# Altium PCB SteezyHS.PcbDoc
Units mm, origin at the board's own origin, x right, y up, seen from the top; angles counter-clockwise.
Board outline 285.25 x 94.86 mm, 2 copper layers (Component Side, Bottom Layer), stack 1.571 mm thick; 150 components, 94 nets, 778 pads, 2 vias.
Unrouted connection lines stored in the file: 189.
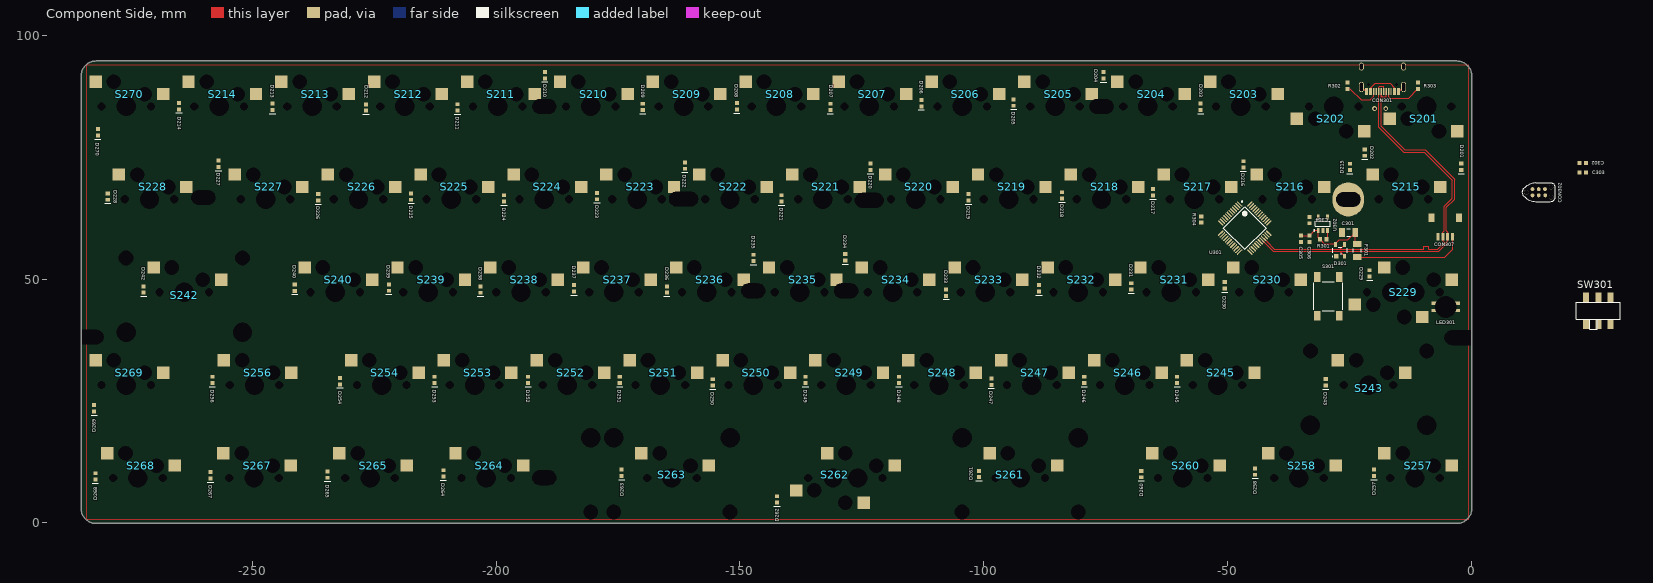
[diagram p0: Component Side view]
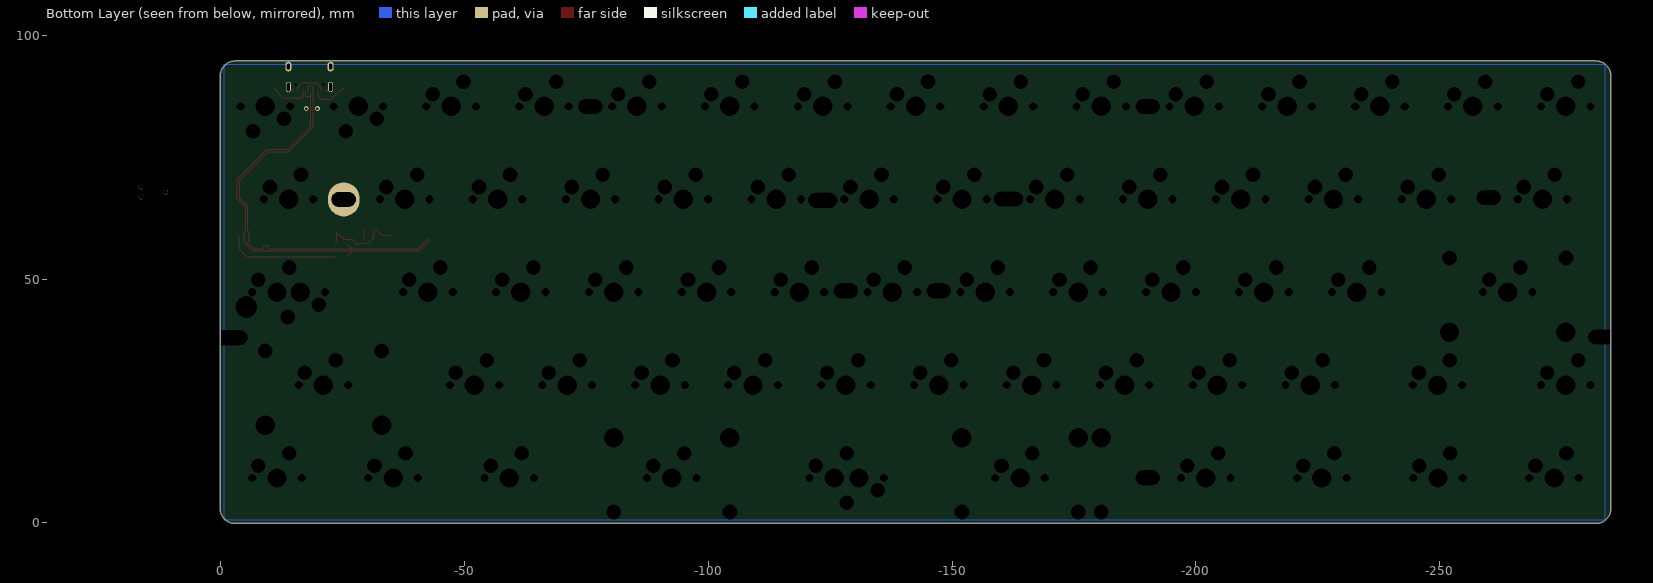
[diagram p1: Bottom Layer view, seen from below]

## Layer stack, top to bottom
Top Solder: solder mask 0.0102, Solder Resist, Dk 3.5
Component Side: signal copper 0.0356
Dielectric 1: core 1.5, FR-4, Dk 4.2
Bottom Layer: signal copper 0.0356
Solder Side: solder mask 0.0102, Solder Resist, Dk 3.5

## Board outline
-285.127,3.01 -285.127,91.615 cw(c-282,91.615) -282,94.742 cw(c-282,94.615) -281.999,94.742 -195.49,94.742 -198.628,94.742 ccw(c-198.628,94.615) -198.629,94.742 -198.628,94.742 -3,94.742 cw(c-3,91.615) 0.127,91.615 0.127,3.01 cw(c-3,3.01) -3,-0.117 cw(c-3,0.01) -3.035,-0.112 -281.965,-0.112 cw(c-282,0.01) -282,-0.117 cw(c-282,3.01)

## Design rules (kind name [scope] priority, off if disabled: settings)
Clearance [All] p1: gap=0.2 ignorepadtopadclearanceinfootprint=FALSE except(0: Arc-Hole Track-Hole SMDPad-Hole THPad-Hole Via-Hole Fill-Hole Poly-Hole Region-Hole Text-Hole; 0.254: THPad-THPad THPad-Via THPad-Fill THPad-Poly THPad-Region THPad-Text Via-Via Via-Fill Via-Poly Via-Region Via-Text Fill-Fill Fill-Poly Fill-Region Fill-Text Poly-Poly Poly-Region Poly-Text Region-Region Region-Text Text-Text)
ComponentClearance [InComponent('No Component') And OnLayer('Component Side')] p1: gap=0.254 collisioncheckmode=3 verticalgap=0.254 showdistances=FALSE
DiffPairsRouting DiffPairsRouting_USB [InDifferentialPairClass('All Differential Pairs')] p1: maxlimit=0.254 minlimit=0.203 mostfreqgap=0.203 toplayer_minwidth=0.152 toplayer_maxwidth=0.381 toplayer_prefwidth=0.152 bottomlayer_minwidth=0.152 bottomlayer_maxwidth=0.381 bottomlayer_prefwidth=0.152 maxuncoupledlength=12.7
DiffPairsRouting [All] p2: maxlimit=0.254 minlimit=0.254 mostfreqgap=0.254 toplayer_minwidth=0.381 toplayer_maxwidth=0.381 toplayer_prefwidth=0.381 bottomlayer_minwidth=0.381 bottomlayer_maxwidth=0.381 bottomlayer_prefwidth=0.381 maxuncoupledlength=12.7
HoleSize [All] p1: absolutevalues=TRUE maxlimit=20 minlimit=0.025 maxpercent=80.000 minpercent=20.000
MatchedLengths MatchedLengths_USB_DiffPairs_1 [All] p1: tolerance=0.127 checknetsindiffpair=TRUE checkdiffpairvsdiffpair=FALSE checkxsignals=FALSE checkothers=FALSE
MatchedLengths MatchedLengths_USB_DiffPairs [All] p2: tolerance=0.127 checknetsindiffpair=TRUE checkdiffpairvsdiffpair=FALSE checkxsignals=FALSE checkothers=FALSE
PolygonConnect PolygonConnect_1 [All vs IsVia] p1: connectstyle=Direct reliefconductorwidth=0.254 reliefentries=4 polygonreliefangle="90 Angle" airgapwidth=0.254
PolygonConnect [All] p2: connectstyle=Relief reliefconductorwidth=0.254 reliefentries=4 polygonreliefangle="90 Angle" airgapwidth=0.254
RoutingVias [All] p1: holewidth=0.711 width=1.27 viastyle="Through Hole" minholewidth=0.711 minwidth=1.27 maxholewidth=0.711 maxwidth=1.27
SolderMaskExpansion [All] p1: expansion=0.102
Width [All] p1: maxlimit=0.254 minlimit=0.203 preferedwidth=0.254
27 further rules are at their usual default settings.

## Classes and differential pairs
component class Designator: C201 C202 C203 C204 C205 C206 D201 D202 D203 D204 D205 D206 D207 D208 D209 D210 D211 D212 D213 D214 D215 D216 D217 D218 D219 D220 D221 D222 D223 D224 D225 D226 D227 D228 D229 D230 D231 D232 D233 D234 D235 D236 D237 D238 D239 D240 D242 D243 D245 D246 D247 D248 D249 D250 D251 D252 D253 D254 D256 D257 D258 D260 D261 D262 D263 D264 D265 D267 D268 D269 D270 S201 S202 S203 S204 S205 S206 S207 S208 S209 S210 S211 S212 S213 S214 S215 S216 S217 S218 S219 S220 S221 S222 S223 S224 S225 S226 S227 S228 S229 S230 S231 S232 S233 S234 S235 S236 S237 S238 S239 S240 S242 S243 S245 S246 S247 S248 S249 S250 S251 S252 S253 S254 S256 S257 S258 S260 S261 S262 S263 S264 S265 S267 S268 S269 S270 S271
differential pair D: +D_P -D_N

## Components (designator, comment, footprint, x,y, rotation, side; value= is the part's Value field where it differs from the comment)
C301 "" C1206[3216] -25.146,59.563 r0 top value=4,7uF
C302 "" C0603[1608] 22.86,73.787 r180 top value=0.1uF
C303 "" C0603[1608] 22.875,71.882 r180 top value=0.1uF
C304 "" C0603[1608] -33.147,62.103 r90 top value=1uF
C305 "" C0603[1608] -34.925,58.278 r90 top value=0.1uF
C306 "" C0603[1608] -33.147,58.278 r90 top value=1uF
CON301 "TYPE-C-31-M-12" TYPE-C-31-M-12 -18.2,88.5 r180 top
CON302 "TC2030-IDC" TC2030-IDC-NL 13.843,67.818 r0 top
CON307 "Header 5" "JST SM04B-SRSS-TB" -2.528,62.611 r180 top
D201 "Diode" D0603[1608] -2.032,73.04 r270 top
D202 "Diode" D0603[1608] -21.844,75.946 r270 top
D203 "Diode" D0603[1608] -55.499,85.359 r270 top
D204 "Diode" D0603[1608] -75.438,91.806 r270 top
D205 "Diode" D0603[1608] -93.853,86.218 r270 top
D206 "Diode" D0603[1608] -112.776,86.091 r270 top
D207 "Diode" D0603[1608] -131.445,85.329 r270 top
D208 "Diode" D0603[1608] -150.622,85.456 r270 top
D209 "Diode" D0603[1608] -169.926,85.329 r270 top
D210 "Diode" D0603[1608] -189.992,91.836 r270 top
D211 "Diode" D0603[1608] -207.899,85.217 r270 top
D212 "Diode" D0603[1608] -226.695,85.202 r270 top
D213 "Diode" D0603[1608] -245.872,85.344 r270 top
D214 "Diode" D0603[1608] -265.049,85.471 r270 top
D215 "Diode" D0603[1608] -24.892,73.01 r270 top
D216 "Diode" D0603[1608] -46.736,73.533 r270 top
D217 "Diode" D0603[1608] -65.278,67.818 r270 top
D218 "Diode" D0603[1608] -83.947,67.168 r270 top
D219 "Diode" D0603[1608] -103.124,66.802 r270 top
D220 "Diode" D0603[1608] -123.19,73.025 r270 top
D221 "Diode" D0603[1608] -141.478,66.548 r270 top
D222 "Diode" D0603[1608] -161.29,73.279 r270 top
D223 "Diode" D0603[1608] -179.324,67.041 r270 top
D224 "Diode" D0603[1608] -198.374,66.548 r270 top
D225 "Diode" D0603[1608] -217.424,66.929 r270 top
D226 "Diode" D0603[1608] -236.474,66.802 r270 top
D227 "Diode" D0603[1608] -256.921,73.675 r270 top
D228 "Diode" D0603[1608] -279.654,66.929 r270 top
D229 "Diode" D0603[1608] -20.828,51.166 r270 top
D230 "Diode" D0603[1608] -50.546,48.753 r270 top
D231 "Diode" D0603[1608] -69.723,48.514 r270 top
D232 "Diode" D0603[1608] -88.646,48.118 r270 top
D233 "Diode" D0603[1608] -107.696,47.229 r270 top
D234 "Diode" D0603[1608] -128.397,54.468 r270 top
D235 "Diode" D0603[1608] -147.193,54.356 r270 top
D236 "Diode" D0603[1608] -164.973,47.879 r270 top
D237 "Diode" D0603[1608] -184.023,48.133 r270 top
D238 "Diode" D0603[1608] -203.2,47.864 r270 top
D239 "Diode" D0603[1608] -221.996,48.26 r270 top
D240 "Diode" D0603[1608] -241.3,48.245 r270 top
D242 "Diode" D0603[1608] -272.288,47.879 r270 top
D243 "Diode" D0603[1608] -29.845,28.829 r270 top
D245 "Diode" D0603[1608] -60.325,29.337 r270 top
D246 "Diode" D0603[1608] -79.375,29.337 r270 top
D247 "Diode" D0603[1608] -98.425,28.971 r270 top
D248 "Diode" D0603[1608] -117.348,29.337 r270 top
D249 "Diode" D0603[1608] -136.525,29.337 r270 top
D250 "Diode" D0603[1608] -155.575,28.814 r270 top
D251 "Diode" D0603[1608] -174.625,29.322 r270 top
D252 "Diode" D0603[1608] -193.421,29.322 r270 top
D253 "Diode" D0603[1608] -212.598,29.322 r270 top
D254 "Diode" D0603[1608] -232.029,29.068 r270 top
D256 "Diode" D0603[1608] -258.191,29.322 r270 top
D257 "Diode" D0603[1608] -19.939,10.272 r270 top
D258 "Diode" D0603[1608] -44.323,10.526 r270 top
D260 "Diode" D0603[1608] -67.691,10.018 r270 top
D261 "Diode" D0603[1608] -100.965,10.033 r270 top
D262 "Diode" D0603[1608] -142.367,4.826 r270 top
D263 "Diode" D0603[1608] -174.244,10.272 r270 top
D264 "Diode" D0603[1608] -210.82,10.145 r270 top
D265 "Diode" D0603[1608] -234.569,9.906 r270 top
D267 "Diode" D0603[1608] -258.572,9.779 r270 top
D268 "Diode" D0603[1608] -282.194,9.54 r270 top
D269 "Diode" D0603[1608] -282.448,23.495 r270 top
D270 "Diode" D0603[1608] -281.686,80.137 r270 top
D301 "PRTR5V0U2X" SOT190P237X120-4N -26.924,55.88 r90 top
F301 "Fuse Thermal" C1206[3216] -23.368,55.88 r270 top
LED301 "QT QBLP677R-RGB" "QT QBLP677R-RGB" -5.221,44.311 r180 top
R301 "" R0603[1608] -30.353,58.166 r0 top value=10K
R302 "Res1" R0603[1608] -25.4,89.677 r90 top value=5k1
R303 "Res1" R0603[1608] -10.922,89.677 r90 top value=5k1
R304 "Res1" R0603[1608] -55.372,62.23 r90 top value=10K
S201 "MX" MXHS-SWITCH -9.15,85.415 r0 bottom locked
S202 "MX" MXHS-SWITCH -28.2,85.415 r0 bottom locked
S203 "MX" MXHS-SWITCH -47.25,85.415 r180 bottom locked
S204 "MX" MXHS-SWITCH -66.3,85.415 r180 bottom locked
S205 "MX" MXHS-SWITCH -85.35,85.415 r180 bottom locked
S206 "MX" MXHS-SWITCH -104.4,85.415 r180 bottom locked
S207 "MX" MXHS-SWITCH -123.45,85.415 r180 bottom locked
S208 "MX" MXHS-SWITCH -142.5,85.415 r180 bottom locked
S209 "MX" MXHS-SWITCH -161.55,85.415 r180 bottom locked
S210 "MX" MXHS-SWITCH -180.6,85.415 r180 bottom locked
S211 "MX" MXHS-SWITCH -199.65,85.415 r180 bottom locked
S212 "MX" MXHS-SWITCH -218.7,85.415 r180 bottom locked
S213 "MX" MXHS-SWITCH -237.75,85.415 r180 bottom locked
S214 "MX" MXHS-SWITCH -256.8,85.415 r180 bottom locked
S215 "MX" "MXHS-SWITCH - 1.5U" -13.912,66.365 r180 bottom locked
S216 "MX" MXHS-SWITCH -37.725,66.365 r180 bottom locked
S217 "MX" MXHS-SWITCH -56.775,66.365 r180 bottom locked
S218 "MX" MXHS-SWITCH -75.825,66.365 r180 bottom locked
S219 "MX" MXHS-SWITCH -94.875,66.365 r180 bottom locked
S220 "MX" MXHS-SWITCH -113.925,66.365 r180 bottom locked
S221 "MX" MXHS-SWITCH -132.975,66.365 r180 bottom locked
S222 "MX" MXHS-SWITCH -152.025,66.365 r180 bottom locked
S223 "MX" MXHS-SWITCH -171.075,66.365 r180 bottom locked
S224 "MX" MXHS-SWITCH -190.125,66.365 r180 bottom locked
S225 "MX" MXHS-SWITCH -209.175,66.365 r180 bottom locked
S226 "MX" MXHS-SWITCH -228.225,66.365 r180 bottom locked
S227 "MX" MXHS-SWITCH -247.275,66.365 r180 bottom locked
S228 "MX" "MXHS-SWITCH - 1.5U" -271.087,66.365 r180 bottom locked
S229 "MX" "MXHS-SWITCH - CAPS_STEPPED_DUAL" -16.294,47.315 r180 bottom
S230 "MX" MXHS-SWITCH -42.487,47.315 r180 bottom locked
S231 "MX" MXHS-SWITCH -61.537,47.315 r180 bottom locked
S232 "MX" MXHS-SWITCH -80.587,47.315 r180 bottom locked
S233 "MX" MXHS-SWITCH -99.637,47.315 r180 bottom locked
S234 "MX" MXHS-SWITCH -118.687,47.315 r180 bottom locked
S235 "MX" MXHS-SWITCH -137.737,47.315 r180 bottom locked
S236 "MX" MXHS-SWITCH -156.787,47.315 r180 bottom locked
S237 "MX" MXHS-SWITCH -175.837,47.315 r180 bottom locked
S238 "MX" MXHS-SWITCH -194.887,47.315 r180 bottom locked
S239 "MX" MXHS-SWITCH -213.937,47.315 r180 bottom locked
S240 "MX" MXHS-SWITCH -232.987,47.315 r180 bottom
S242 "MX" "MXHS-SWITCH - ENTER_ANSI" -263.95,47.315 r180 bottom
S243 "MX" "MXHS-SWITCH - LEFT SHIFT ANSI" -21.056,28.265 r180 bottom
S245 "MX" MXHS-SWITCH -52.012,28.265 r180 bottom locked
S246 "MX" MXHS-SWITCH -71.062,28.265 r180 bottom locked
S247 "MX" MXHS-SWITCH -90.112,28.265 r180 bottom locked
S248 "MX" MXHS-SWITCH -109.162,28.265 r180 bottom locked
S249 "MX" MXHS-SWITCH -128.212,28.265 r180 bottom locked
S250 "MX" MXHS-SWITCH -147.262,28.265 r180 bottom locked
S251 "MX" MXHS-SWITCH -166.312,28.265 r180 bottom locked
S252 "MX" MXHS-SWITCH -185.362,28.265 r180 bottom locked
S253 "MX" MXHS-SWITCH -204.412,28.265 r180 bottom locked
S254 "MX" MXHS-SWITCH -223.462,28.265 r180 bottom locked
S256 "MX" "MXHS-switch - right shift_split" -259.08,28.265 r180 bottom
S257 "MX" "MXHS-SWITCH - L_CTRL" -13.912,9.215 r180 bottom
S258 "MX" "MXHS-SWITCH - L_WIN" -37.724,9.215 r180 bottom
S260 "MX" "MXHS-switch - L_alt" -61.537,9.215 r180 bottom
S261 "MX" "MXHS-SWITCH - L SPLIT SPACE" -102.018,9.215 r0 bottom
S262 "MX" "MXHS-switch - Space_V2" -142.499,9.215 r180 bottom
S263 "MX" "MXHS-SWITCH - R SPLIT SPACE" -163.931,9.215 r0 bottom
S264 "MX" "MXHS-SWITCH - 1.25U" -202.031,9.215 r180 bottom
S265 "MX" "MXHS-SWITCH - R_ALT_V2" -223.462,9.215 r180 bottom
S267 "MX" "MXHS-SWITCH - R_WIN" -247.274,9.215 r180 bottom
S268 "MX" "MXHS-SWITCH - R_CTRL" -271.087,9.215 r180 bottom
S269 "MX" MXHS-SWITCH -275.85,28.265 r180 bottom locked
S270 "MX" MXHS-SWITCH -275.85,85.415 r180 bottom
S301 "SW-PB" 430152050826 -29.337,46.482 r270 top
SW301 "MKH-22D14-G2-B" MKH-22D14-G2-B 26.075,43.478 r0 top
U301 "STM32F072" STM32F072 -46.455,60.473 r315 top
U302 "TLV70033DDCR" SOT-23-5 -30.414,61.363 r90 top

## Footprints (in the part's own frame and the unit in brackets; to place one, negate y for a bottom-side part, rotate by r counter-clockwise, add the part's x,y. Pads: shape width x height; smd on the part's side, far side on the other; paste and mask are expansions set on the pad)
430152050826 [mm] "Wurth Electronics Inc."
  rect 2x1.3 smd: 1(-3.975,2.25) 2(-3.975,-2.25) ""(3.975,2.25) ""(3.975,-2.25)
  silkscreen extent -3,-3 3,3, body extent -4.5,-3.1 4.5,3.1, height 5
C0603[1608] [mm] "Chip Resistor, 2-Leads, Body 1,57x0,80mm, IPC Medium Density"
  rect 0.8x0.85 smd: 1(-0.65,0) 2(0.65,0)
  body extent -0.83,-0.43 0.82,0.43, height 0.5
C1206[3216] [mm]
  rect 1.2x1.8 smd: 1(-1.35,0) 2(1.35,0)
  silkscreen extent -0.35,-0.8 0.35,0.8, body extent -1.6,-0.9 1.6,0.9, height 1.2
D0603[1608] [mm] "Chip Resistor, 2-Leads, Body 1,57x0,80mm, IPC Medium Density"
  rect 0.8x0.85 smd: 1(-0.65,0) 2(0.65,0)
  silkscreen extent 1.4,-0.63 1.4,0.64, body extent -0.8,-0.45 0.8,0.45, height 0.59
"JST SM04B-SRSS-TB" [mm]
  rect 0.6x1.55 smd: 1(1.3,3.875) 2(2.3,3.875) 3(3.3,3.875) 4(4.3,3.875)
  rect 1.2x1.8 smd: 5(0,0) 5(5.6,0)
  body extent -0.21,-0.76 5.79,4.19, height 3.25
MKH-22D14-G2-B [mm]
  rect 1.2x2 smd: 1(2.5,-2.75) 2(0,-2.75) 3(-2.5,-2.75) 4(2.5,2.75) 5(0,2.75) 6(-2.5,2.75)
  silkscreen extent -4.5,-3.75 4.5,1.75, body extent -4.25,-3.75 4.25,2.5, height 3.5
MXHS-SWITCH [mm]
  rect 2.55x2.5 smd far side: 1(6.29,5.08) 2(-7.56,2.54)
  round 1 hole 1.702 unplated: ""(-5.08,0) ""(5.08,0)
  round 0 hole 3 unplated: ""(-3.81,2.54) ""(2.54,5.08)
  round 1 hole 3.988 unplated: ""(0,0)
  body extent -7.76,0.97 6.74,6.86, height 0.8
"MXHS-SWITCH - 1.5U" [mm]
  rect 2.55x2.5 smd far side: 1(6.29,5.08) 2(-7.56,2.54)
  round 1 hole 1.702 unplated: ""(-5.08,0) ""(5.08,0)
  round 0 hole 3 unplated: ""(-3.81,2.54) ""(2.54,5.08)
  round 1 hole 3.988 unplated: ""(0,0)
  round 1 on Mech14: ""(0,0)
  body extent -7.76,0.97 6.74,6.86, height 0.8
"MXHS-SWITCH - 1.25U" [mm]
  rect 2.55x2.5 smd far side: 1(6.29,5.08) 2(-7.56,2.54)
  round 1 hole 1.702 unplated: ""(-5.08,0) ""(5.08,0)
  round 0 hole 3 unplated: ""(-3.81,2.54) ""(2.54,5.08)
  round 1 hole 3.988 unplated: ""(0,0)
  round 1 on Mech14: ""(0,0)
  body extent -7.76,0.97 6.74,6.86, height 0.8
"MXHS-SWITCH - CAPS_STEPPED_DUAL" [mm]
  rect 2.55x2.5 smd far side: 1(-6.29,-5.08) 1(1.528,5.08) 2(-12.323,2.54) 2(7.56,-2.54)
  round 1 hole 1.702 unplated: ""(-9.842,0) ""(5.08,0)
  round 0 hole 3 unplated: ""(-8.572,2.54) ""(-2.54,-5.08) ""(-2.222,5.08) ""(3.81,-2.54)
  round 1 hole 3.988 unplated: ""(-4.763,0) ""(0,0)
  round 1 on Mech14: ""(-4.763,0) ""(0,0)
  body extent -12.52,-6.86 7.76,6.86, height 0.8
"MXHS-SWITCH - ENTER_ANSI" [mm]
  rect 2.55x2.5 smd far side: 1(6.29,5.08) 2(-7.56,2.54)
  round 1.524 hole 3.988 unplated: ""(-11.938,-8.255) ""(11.938,-8.255)
  round 1.524 hole 3.048 unplated: ""(-11.938,6.985) ""(11.938,6.985)
  round 1 hole 1.702 unplated: ""(-5.08,0) ""(5.08,0)
  round 0 hole 3 unplated: ""(-3.81,2.54) ""(2.54,5.08)
  round 1 hole 3.988 unplated: ""(0,0)
  round 1 on Mech14: ""(0,0)
  body extent -7.76,0.97 6.74,6.86, height 0.8
"MXHS-SWITCH - L SPLIT SPACE" [mm]
  rect 2.55x2.5 smd far side: 1(3.235,-5.08) 2(17.085,-2.54)
  round 1.524 hole 3.988 unplated: ""(-2.413,-8.255)
  round 1.524 hole 3.048 unplated: ""(-2.413,6.985)
  round 1 hole 1.702 unplated: ""(4.445,0) ""(14.605,0)
  round 0 hole 3 unplated: ""(6.985,-5.08) ""(13.335,-2.54)
  round 1 hole 3.988 unplated: ""(9.525,0)
  round 1 on Mech14: ""(9.525,0)
  body extent 2.78,-6.86 17.28,-0.97, height 0.8
"MXHS-switch - L_alt" [mm]
  rect 2.55x2.5 smd far side: 1(3.909,5.08) 2(-9.941,2.54)
  round 1 hole 1.702 unplated: ""(-7.461,0) ""(2.699,0)
  round 0 hole 3 unplated: ""(-6.191,2.54) ""(0.159,5.08)
  round 1 hole 3.988 unplated: ""(-2.381,0)
  round 1 on Mech14: ""(-2.381,0) ""(0,0)
  body extent -10.14,0.97 4.36,6.86, height 0.8
"MXHS-SWITCH - L_CTRL" [mm]
  rect 2.55x2.5 smd far side: 1(3.909,5.08) 2(-9.941,2.54)
  round 1 hole 1.702 unplated: ""(-7.461,0) ""(2.699,0)
  round 0 hole 3 unplated: ""(-6.191,2.54) ""(0.159,5.08)
  round 1 hole 3.988 unplated: ""(-2.381,0)
  round 1 on Mech14: ""(-2.381,0) ""(0,0)
  body extent -10.14,0.97 4.36,6.86, height 0.8
"MXHS-SWITCH - L_WIN" [mm]
  rect 2.55x2.5 smd far side: 1(3.909,5.08) 2(-9.941,2.54)
  round 1 hole 1.702 unplated: ""(-7.461,0) ""(2.699,0)
  round 0 hole 3 unplated: ""(-6.191,2.54) ""(0.159,5.08)
  round 1 hole 3.988 unplated: ""(-2.381,0)
  round 1 on Mech14: ""(-2.381,0) ""(0,0)
  body extent -10.14,0.97 4.36,6.86, height 0.8
"MXHS-SWITCH - LEFT SHIFT ANSI" [mm]
  rect 2.55x2.5 smd far side: 1(6.29,5.08) 2(-7.56,2.54)
  round 1.524 hole 3.988 unplated: ""(-11.938,-8.255) ""(11.938,-8.255)
  round 1.524 hole 3.048 unplated: ""(-11.938,6.985) ""(11.938,6.985)
  round 1 hole 1.702 unplated: ""(-5.08,0) ""(5.08,0)
  round 0 hole 3 unplated: ""(-3.81,2.54) ""(2.54,5.08)
  round 1 hole 3.988 unplated: ""(0,0)
  round 1 on Mech14: ""(0,0)
  body extent -7.76,0.97 6.74,6.86, height 0.8
"MXHS-SWITCH - R SPLIT SPACE" [mm]
  rect 2.55x2.5 smd far side: 1(-6.29,-5.08) 2(7.56,-2.54)
  round 1.524 hole 3.988 unplated: ""(-11.938,-8.255) ""(11.938,-8.255)
  round 1.524 hole 3.048 unplated: ""(-11.938,6.985) ""(11.938,6.985)
  round 1 hole 1.702 unplated: ""(-5.08,0) ""(5.08,0)
  round 0 hole 3 unplated: ""(-2.54,-5.08) ""(3.81,-2.54)
  round 1 hole 3.988 unplated: ""(0,0)
  round 1 on Mech14: ""(0,0)
  body extent -6.74,-6.86 7.76,-0.97, height 0.8
"MXHS-SWITCH - R_ALT_V2" [mm] "No infinity hacker"
  rect 2.55x2.5 smd far side: 1(8.671,5.08) 2(-5.179,2.54)
  round 1 hole 1.702 unplated: ""(-2.699,0) ""(7.461,0)
  round 0 hole 3 unplated: ""(-1.429,2.54) ""(4.921,5.08)
  round 1 on Mech14: ""(0,0) ""(2.381,0) ""(2.381,0)
  round 1 hole 3.988 unplated: ""(2.381,0)
  body extent -5.38,0.97 9.12,6.86, height 0.8
"MXHS-SWITCH - R_CTRL" [mm]
  rect 2.55x2.5 smd far side: 1(8.671,5.08) 2(-5.179,2.54)
  round 1 hole 1.702 unplated: ""(-2.699,0) ""(7.461,0)
  round 0 hole 3 unplated: ""(-1.429,2.54) ""(4.921,5.08)
  round 1 on Mech14: ""(0,0) ""(2.381,0) ""(2.381,0)
  round 1 hole 3.988 unplated: ""(2.381,0)
  body extent -5.38,0.97 9.12,6.86, height 0.8
"MXHS-SWITCH - R_WIN" [mm]
  rect 2.55x2.5 smd far side: 1(8.671,5.08) 2(-5.179,2.54)
  round 1 hole 1.702 unplated: ""(-2.699,0) ""(7.461,0)
  round 0 hole 3 unplated: ""(-1.429,2.54) ""(4.921,5.08)
  round 1 on Mech14: ""(0,0) ""(2.381,0) ""(2.381,0)
  round 1 hole 3.988 unplated: ""(2.381,0)
  body extent -5.38,0.97 9.12,6.86, height 0.8
"MXHS-switch - right shift_split" [mm]
  rect 2.55x2.5 smd far side: 1(-3.235,5.08) 2(-17.085,2.54)
  round 1 hole 1.702 unplated: ""(-14.605,0) ""(-4.445,0)
  round 0 hole 3 unplated: ""(-13.335,2.54) ""(-6.985,5.08)
  round 1 hole 3.988 unplated: ""(-9.525,0)
  round 1 on Mech14: ""(-9.525,0)
  body extent -17.28,0.97 -2.78,6.86, height 0.8
"MXHS-switch - Space_V2" [mm]
  rect 2.55x2.5 smd far side: 1(-10.386,5.08) 1(-4.036,-2.54) 2(-24.236,2.54) 2(-17.886,-5.08)
  round 1.524 hole 3.048 unplated: ""(-61.91,-6.985) ""(38.09,-6.985)
  round 1.524 hole 3.988 unplated: ""(-61.91,8.255) ""(38.09,8.255)
  round 1 hole 1.702 unplated: ""(-21.756,0) ""(-6.516,0)
  round 0 hole 3 unplated: ""(-20.486,2.54) ""(-14.136,-5.08) ""(-14.136,5.08) ""(-7.786,-2.54)
  round 1 hole 3.988 unplated: ""(-16.676,0) ""(-11.596,0)
  round 1 on Mech14: ""(-16.676,0) ""(-11.596,0)
  body extent -24.43,-6.86 -3.84,6.86, height 0.8
"QT QBLP677R-RGB" [mm]
  rect 1.2x0.7 smd: 1(-2.3,-0.75) 2(2.3,-0.75) 3(2.3,0.75) 4(-2.3,0.75)
  round 1 hole 4.5 unplated: ""(0,0)
R0603[1608] [mm] "Chip Resistor, 2-Leads, Body 1,57x0,80mm, IPC Medium Density"
  rect 0.8x0.85 smd: 1(-0.65,0) 2(0.65,0)
  body extent -0.83,-0.43 0.82,0.43, height 0.5
SOT190P237X120-4N [mm] "SOT143, 4-Leads, Body 3,00x2,37mm, Pitch 1,90mm, IPC Medium Density"
  rect 1x1 smd: 1(-1.2,0.75)
  rect 1x0.6 smd: 2(-1.2,-0.95) 3(1.2,-0.95) 4(1.2,0.95)
  silkscreen extent -1.25,-1.5 0.7,1.6, body extent -1.25,-1.5 1.24,1.5, height 1.09
SOT-23-5 [mm]
  rect 1x0.55 smd: 1(-1.375,0.95) 2(-1.375,0) 3(-1.375,-0.95) 4(1.375,-0.95) 5(1.375,0.95)
  silkscreen extent -1.5,-1.55 0.46,1.92, body extent -1.63,-1.5 1.58,1.5, height 0.92
STM32F072 [mm] "LQFP48, 7x7mm"
  oval 1.45x0.3 smd: 1(-4.225,2.75) 2(-4.225,2.25) 3(-4.225,1.75) 4(-4.225,1.25) 5(-4.225,0.75) 6(-4.225,0.25) 7(-4.225,-0.25) 8(-4.225,-0.75) 9(-4.225,-1.25) 10(-4.225,-1.75) 11(-4.225,-2.25) 12(-4.225,-2.75) 25(4.225,-2.75) 26(4.225,-2.25) 27(4.225,-1.75) 28(4.225,-1.25) 29(4.225,-0.75) 30(4.225,-0.25) 31(4.225,0.25) 32(4.225,0.75) 33(4.225,1.25) 34(4.225,1.75) 35(4.225,2.25) 36(4.225,2.75)
  oval 0.3x1.45 smd: 13(-2.75,-4.225) 14(-2.25,-4.225) 15(-1.75,-4.225) 16(-1.25,-4.225) 17(-0.75,-4.225) 18(-0.25,-4.225) 19(0.25,-4.225) 20(0.75,-4.225) 21(1.25,-4.225) 22(1.75,-4.225) 23(2.25,-4.225) 24(2.75,-4.225) 37(2.75,4.225) 38(2.25,4.225) 39(1.75,4.225) 40(1.25,4.225) 41(0.75,4.225) 42(0.25,4.225) 43(-0.25,4.225) 44(-0.75,4.225) 45(-1.25,4.225) 46(-1.75,4.225) 47(-2.25,4.225) 48(-2.75,4.225)
  silkscreen extent -4.35,-3.1 3.1,3.57, body extent -4.5,-4.5 4.5,4.5, height 1.6
TC2030-IDC-NL [mm] "Tag-Connect 6-Pin with No Legs (PN# TC2030-IDC-NL)"
  round 0.9 hole 0.995 unplated: 0(-2.54,0) 0(2.54,-1.016) 0(2.54,1.016)
  round 0.79 smd paste-0.39: 1(-1.27,-0.635) 2(-1.27,0.635) 3(0,-0.635) 4(0,0.635) 5(1.35,-0.635) 6(1.27,0.635)
  silkscreen extent -3.43,-1.91 3.43,1.9
TYPE-C-31-M-12 [mm]
  rect 0.6x1.45 smd: A1B12(-3.25,0) A4B9(-2.45,0) B1A12(3.25,0) B4A9(2.45,0)
  rect 0.3x1.45 smd: A5(-1.25,0) A6(-0.25,0) A7(0.25,0) A8(1.25,0) B5(1.75,0) B6(0.75,0) B7(-0.75,0) B8(-1.75,0)
  oval 1x2.1 hole 0.6 slot 1.7 at 90 deg: S1(-4.32,-0.915) S1(4.32,-0.915)
  oval 1x1.6 / inner oval 1x1.6 / far side oval 1.3x2 hole 0.6 slot 1.2 at 90 deg: S1(-4.32,-5.095) S1(4.32,-5.095)
  round 0 hole 0.65 unplated: ""(-2.89,-1.445) ""(2.89,-1.445)
  body extent -4.47,-7.72 4.47,0.18, height 3.21

## Part data
C301: library part Cap, "Capacitor", LCSC MFG="Guangdong Fenghua Advanced Tech", LCSCPN=C29823, MFG=KEMET, MFGPN=C0603C104M5RACTU, MRF.Part=1206B475K500NT, Version="1206 imperial"
C302 C303: library part Cap, "Capacitor", LCSC MFG=YAGEO, LCSCPN=C14663, MFG=KEMET, MFGPN=C0603C104M5RACTU, MRF.Part=CC0603KRX7R9BB104, Version="0603 imperial"
C304 C305 C306: library part Cap, "Capacitor", MFG=KEMET, Version="0603 imperial"
  C304 C306: MFGPN=C0603C105K4RACTU
  C305: MFGPN=C0603C104M5RACTU
CON301: LCSC MFG="Korean Hroparts Elec", LCSCPN=C165948, MFG="Korean Hroparts Elec", MFGPN=TYPE-C-31-M-12, MRF.Part=TYPE-C-31-M-12
CON302: library part "Header 3X2", "Header, 3-Pin, Dual row"
CON307: "Header, 5-Pin", LCSC MFG="JST Sales America", LCSCPN=C160404, MFG="JST Sales America Inc.", MFGPN=SM04B-SRSS-TB(LF)(SN), MRF.Part=SM04B-SRSS-TB(LF)(SN)
D201 D202 D203 D204 D205 D206 D207 D208 D209 D210 D211 D212 D213 D214 D215 D216 D217 D218 D219 D220 D221 D222 D223 D224 D225 D226 D227 D228 D229 D230 D231 D232 D233 D234 D235 D236 D237 D238 D239 D240 D242 D243 D245 D246 D247 D248 D249 D250 D251 D252 D253 D254 D256 D257 D258 D260 D261 D262 D263 D264 D265 D267 D268 D269 D270: "Default Diode", LCSC MFG="Brightking Elec (TAIWAN)", LCSCPN=C109002, MFG="Bourns Inc.", MFGPN=CD0603-B0340R, MRF.Part=CD4148WTP, Version="0603 imperial"
D301: LCSC MFG="Brightking Elec (TAIWAN)", LCSCPN=C78442, MFG="Nexperia USA Inc.", MFGPN=PRTR5V0U2X,215, MRF.Part=UET14A05L03
F301: "Thermal Fuse", LCSC MFG="Shenzhen JDT Fuse", LCSCPN=C135338, MFG="Bel Fuse Inc.", MFGPN=0ZCJ0050FF2G, MRF.Part=ASMD1206-050
R301: library part Res1, "Resistor", MFG="Vishay Dale", MFGPN=RCA060310K0FKEA, Version="0603 imperial"
R302 R303: "Resistor", LCSC MFG="Uniroyal Elec", LCSCPN=C23186, MFG="Panasonic Electronic Components", MFGPN=ERJ-3EKF5101V, MRF.Part=0603WAF5101T5E, Version="0603 imperial"
R304: "Resistor", LCSC MFG="Uniroyal Elec", LCSCPN=C25804, MFG="Panasonic Electronic Components", MFGPN=ERJ-3EKF5101V, MRF.Part=0603WAF1002T5E, Version="0603 imperial"
S201 S202 S203 S204 S205 S206 S207 S208 S209 S210 S211 S212 S213 S214 S216 S217 S218 S219 S220 S221 S222 S223 S224 S225 S226 S227 S228 S229 S230 S231 S232 S233 S234 S235 S236 S237 S238 S239 S240 S242 S243 S245 S246 S247 S248 S249 S250 S251 S252 S253 S254 S256 S257 S258 S260 S261 S262 S263 S264 S265 S267 S268 S269 S270: library part SW-PB, "Switch"
S215: library part SW-PB, "TAB"
S301: "Switch", LCSC MFG="XKB Enterprise", LCSCPN=C318888, MFG=C&K, MFGPN="PTS645SM43SMTR92 LFS", MRF.Part=TS-1187A-C-D-B
SW301: "Slide Switch DPDT", Manufacturer=Dailywell, Manufacturer Part Number=MKH-22D14-G2-B, Part Number=MKH-22D14-G2-B, Pin Count=6
U302: library part TLV733P, MFG="Texas Instruments", MFGPN=TLV70033DDCR
U301: MFG=STMicroelectronics, MFGPN=STM32F072CBT6TR

## Free pads (board coordinates)
  round 1 hole 3 slot 5 at 0 deg unplated: "5 degree"(-190.119,85.415) "5 degree"(-75.819,85.415) CHECK(-147.25,47.615)
  round 1.524 hole 3 slot 6 at 0 deg unplated: CHECK(-161.55,66.421) CHECK(-123.45,66.167)
  oval 6.5x7 hole 3 slot 5 at 0 deg: CHECK(-25.2,66.365)
  round 0 hole 3 slot 7 at 0 deg unplated: POKER(-284,38.115) POKER(-2,37.988)
  round 0 hole 3 slot 5 at 0 deg: POKER(-260.05,66.715) POKER(-190.119,9.271) TADA(-128.2,47.615)

## Via types
v1: diameter 1, hole 0.5, Component Side to Bottom Layer, tented both sides, 2 vias

## Nets (pads, with @x,y where several pads share a name; then routed paths per layer and width w, separated by ;. In a path a pad name is that pad's centre, name@x,y a point inside that pad or via, vN(x,y) a via of type N, cw(c..) or ccw(c..) an arc to the next point about the centre after c; other vN are vias at no path point)
col0: S201.2 S215.2 S229.2 S243.2 S257.2
col1: S202.2 S216.2 S230.2 S258.2
col2: S203.2 S217.2 S231.2 S245.2 S260.2
col3: S204.2 S218.2 S232.2 S246.2
col4: S205.2 S219.2 S233.2 S247.2 S261.2
col5: S206.2 S220.2 S234.2 S248.2
col6: S207.2 S221.2 S235.2 S249.2 S262.2 | length 1.2
  Component Side w0.254: -136.653,70.865 -135.475,70.865
col7: S208.2 S222.2 S236.2 S250.2
col8: S209.2 S223.2 S237.2 S251.2 S263.2
col9: S210.2 S224.2 S238.2 S252.2 S264.2
col10: S211.2 S225.2 S239.2 S253.2 S265.2
col11: S212.2 S226.2 S240.2 S254.2 S267.2
col12: S213.2 S227.2 S256.2 S268.2 | length 0.3
  Bottom Layer w0.254: -275.968,13.459 -275.968,13.715
col13: S214.2 S228.2 S242.2 S269.2 S270.2
D_N: CON301.A7 CON301.B7 CON307.2 D301.2 U301.32 | length 84
  Component Side w0.254: U301.32 -42.335,57.413 -42.304,57.413 -40.568,55.677 -26.971,55.677 ; D301.2 -26.971,55.677 ; CON301.B7 -17.473,88.477 -17.473,87.448 -18.235,87.448 -18.427,87.64 -18.427,88.138 -18.45,88.138 -18.45,87.648 -18.471,87.627 -18.471,81.336 -13.665,76.53 -9.463,76.53 -3.422,70.49 -3.422,66.428 -5.099,64.751 -5.099,59.909 -4.828,59.638 CON307.2 -4.828,57.834 -5.099,57.563 -5.099,57.215 -6.637,55.677 -26.971,55.677
D_P: CON301.A6 CON301.B6 CON307.3 D301.3 U301.33 | length 84.8
  Component Side w0.254: U301.33 -41.981,57.767 -41.981,57.737 -40.379,56.134 -26.92,56.134 ; D301.3 -26.92,56.134 ; CON301.A6 -17.973,88.5 -17.973,89.552 -18.735,89.552 -18.927,89.36 -18.927,88.5 CON301.B6 -18.95,87.648 -18.929,87.627 -18.929,81.147 -13.855,76.073 -9.652,76.073 -3.879,70.3 -3.879,66.617 -5.557,64.94 -5.557,59.909 -5.828,59.638 CON307.3 -5.828,57.834 -5.557,57.563 -5.557,57.404 -6.827,56.134 -7.239,56.134 -7.741,56.134 -8.745,56.134 -8.745,56.738 -9.749,56.738 -9.749,56.134 -14.224,56.134 -26.92,56.134
GND: C301.1 C302.1 C303.1 C304.1 C305.1 C306.1 CON301.A1B12 CON301.B1A12 CON301.S1 CON307.4 CON307.5 D301.1 pad.CHECK@-25.2,66.365 pad.POKER@-190.119,9.271 pad.POKER@-260.05,66.715 pad.TADA R302.2 R303.2 S301.2 U302.2 | length 2.9
  Component Side w0.254: CON301.S1@-22.52,89.415 -21.605,88.5 CON301.B1A12 ; CON301.A1B12 -14.795,88.5 CON301.S1@-13.88,89.415
  other v1: -19.812,84.963 -17.526,84.963
NetCON301_A5: CON301.A5 R303.1 | length 8
  Component Side w0.254: CON301.A5 -16.95,87.436 -16.636,87.122 -12.827,87.122 R303.1
NetCON301_B5: CON301.B5 R302.1 | length 7.7
  Component Side w0.254: R302.1 -24.892,89.027 -22.606,86.741 -20.712,86.741 -19.95,87.503 CON301.B5
NetD201_1: D201.1 S201.1
NetD202_1: D202.1 S202.1
NetD203_1: D203.1 S203.1
NetD204_1: D204.1 S204.1
NetD205_1: D205.1 S205.1
NetD206_1: D206.1 S206.1
NetD207_1: D207.1 S207.1
NetD208_1: D208.1 S208.1
NetD209_1: D209.1 S209.1
NetD210_1: D210.1 S210.1
NetD211_1: D211.1 S211.1
NetD212_1: D212.1 S212.1
NetD213_1: D213.1 S213.1
NetD214_1: D214.1 S214.1
NetD215_1: D215.1 S215.1
NetD216_1: D216.1 S216.1
NetD217_1: D217.1 S217.1
NetD218_1: D218.1 S218.1
NetD219_1: D219.1 S219.1
NetD220_1: D220.1 S220.1
NetD221_1: D221.1 S221.1
NetD222_1: D222.1 S222.1
NetD223_1: D223.1 S223.1
NetD224_1: D224.1 S224.1
NetD225_1: D225.1 S225.1
NetD226_1: D226.1 S226.1
NetD227_1: D227.1 S227.1
NetD228_1: D228.1 S228.1
NetD229_1: D229.1 S229.1
NetD230_1: D230.1 S230.1
NetD231_1: D231.1 S231.1
NetD232_1: D232.1 S232.1
NetD233_1: D233.1 S233.1
NetD234_1: D234.1 S234.1
NetD235_1: D235.1 S235.1
NetD236_1: D236.1 S236.1
NetD237_1: D237.1 S237.1
NetD238_1: D238.1 S238.1
NetD239_1: D239.1 S239.1
NetD240_1: D240.1 S240.1
NetD242_1: D242.1 S242.1
NetD243_1: D243.1 S243.1
NetD245_1: D245.1 S245.1
NetD246_1: D246.1 S246.1
NetD247_1: D247.1 S247.1
NetD248_1: D248.1 S248.1
NetD249_1: D249.1 S249.1
NetD250_1: D250.1 S250.1
NetD251_1: D251.1 S251.1
NetD252_1: D252.1 S252.1
NetD253_1: D253.1 S253.1
NetD254_1: D254.1 S254.1
NetD256_1: D256.1 S256.1
NetD257_1: D257.1 S257.1
NetD258_1: D258.1 S258.1
NetD260_1: D260.1 S260.1
NetD261_1: D261.1 S261.1
NetD262_1: D262.1 S262.1
NetD263_1: D263.1 S263.1
NetD264_1: D264.1 S264.1
NetD265_1: D265.1 S265.1
NetD267_1: D267.1 S267.1
NetD268_1: D268.1 S268.1
NetD269_1: D269.1 S269.1
NetD270_1: D270.1 S270.1
NetR301_2: R301.2 U302.3 | length 1.9
  Component Side w0.254: R301.2 -29.464,58.405 U302.3
NetR304_2: R304.2 S301.1 U301.7
RAW: CON301.A4B9 CON301.B4A9 CON307.1 F301.2 | length 30.5
  Component Side w0.254: F301.2 -5.414,54.53 -3.828,56.116 CON307.1 -3.455,59.109 ; CON301.B4A9 -20.65,89.205 -19.685,90.17 -16.637,90.17 -15.75,89.283 CON301.A4B9
row0: D201.2 D202.2 D203.2 D204.2 D205.2 D206.2 D207.2 D208.2 D209.2 D210.2 D211.2 D212.2 D213.2 D214.2
row1: D215.2 D216.2 D217.2 D218.2 D219.2 D220.2 D221.2 D222.2 D223.2 D224.2 D225.2 D226.2 D227.2 D228.2
row2: D229.2 D230.2 D231.2 D232.2 D233.2 D234.2 D235.2 D236.2 D237.2 D238.2 D239.2 D240.2 D242.2
row3: D243.2 D245.2 D246.2 D247.2 D248.2 D249.2 D250.2 D251.2 D252.2 D253.2 D254.2 D256.2 D269.2
row4: D257.2 D258.2 D260.2 D261.2 D262.2 D263.2 D264.2 D265.2 D267.2 D268.2 D270.2
VCC3V3: C302.2 C303.2 C304.2 R304.1 U302.5
VCC5V: C301.2 C305.2 C306.2 D301.4 F301.1 R301.1 U302.1 | length 17.2
  Component Side w0.254: C305.2 C306.2 -32.087,59.988 U302.1 -31.364,58.527 R301.1 -30.114,57.277 -28.071,57.277 D301.4 -27.874,57.216 -27.051,58.039 -25.32,58.039 C301.2 -23.796,57.658 F301.1
pads on no net: CON301. CON301.A8 CON301.B8 CON302.0 CON302.1 CON302.2 CON302.3 CON302.4 CON302.5 CON302.6 LED301. LED301.1 LED301.2 LED301.3 LED301.4 S201. S202. S203. S204. S205. S206. S207. S208. S209. S210. S211. S212. S213. S214. S215. S216. S217. S218. S219. S220. S221. S222. S223. S224. S225. S226. S227. S228. S229. S230. S231. S232. S233. S234. S235. S236. S237. S238. S239. S240. S242. S243. S245. S246. S247. S248. S249. S250. S251. S252. S253. S254. S256. S257. S258. S260. S261. S262. S263. S264. S265. S267. S268. S269. S270. S301. SW301.1 SW301.2 SW301.3 SW301.4 SW301.5 SW301.6 U301.1 U301.2 U301.3 U301.4 U301.5 U301.6 U301.8 U301.9 U301.10 U301.11 U301.12 U301.13 U301.14 U301.15 U301.16 U301.17 U301.18 U301.19 U301.20 U301.21 U301.22 U301.23 U301.24 U301.25 U301.26 U301.27 U301.28 U301.29 U301.30 U301.31 U301.34 U301.35 U301.36 U301.37 U301.38 U301.39 U301.40 U301.41 U301.42 U301.43 U301.44 U301.45 U301.46 U301.47 U301.48 U302.4

## Polygon pours and split planes (outlines as drawn)
GND on Component Side "Component Side-No Net" (solid, shelved, pour order 2): -0.635,93.995 -0.635,0.65 -283.972,0.65 -283.972,93.995
GND on Bottom Layer "Component Side-No Net" (solid, shelved, pour order 0): -0.635,93.995 -0.635,0.65 -283.972,0.65 -283.972,93.995

## Other copper
Component Side:
  pour cut-out: -4.117,97.055 ccw(c-4.117,95.555) -4.117,94.054 cw(c-4.117,90.555) -0.617,90.555 ccw(c0.883,90.555) 0.883,89.054 ccw(c0.883,90.555) 2.384,90.555 ccw(c-4.117,90.555)
  pour cut-out: 2.44,4.117 ccw(c0.94,4.117) -0.561,4.117 cw(c-4.06,4.117) -4.06,0.617 ccw(c-4.06,-0.883) -5.561,-0.883 ccw(c-4.06,-0.883) -4.06,-2.384 ccw(c-4.06,4.117)
  pour cut-out: -287.043,90.504 ccw(c-285.543,90.504) -284.043,90.504 cw(c-280.543,90.504) -280.543,94.004 ccw(c-280.543,95.504) -279.043,95.504 ccw(c-280.543,95.504) -280.543,97.004 ccw(c-280.543,90.504)
  pour cut-out: -280.49,-2.44 ccw(c-280.49,-0.94) -280.49,0.561 cw(c-280.49,4.06) -283.99,4.06 ccw(c-285.49,4.06) -285.49,5.561 ccw(c-285.49,4.06) -286.991,4.06 ccw(c-280.49,4.06)
Bottom Layer:
  pour cut-out: -287.043,90.504 ccw(c-285.543,90.504) -284.043,90.504 cw(c-280.543,90.504) -280.543,94.004 ccw(c-280.543,95.504) -279.043,95.504 ccw(c-280.543,95.504) -280.543,97.004 ccw(c-280.543,90.504)
  pour cut-out: 2.44,4.117 ccw(c0.94,4.117) -0.561,4.117 cw(c-4.06,4.117) -4.06,0.617 ccw(c-4.06,-0.883) -5.561,-0.883 ccw(c-4.06,-0.883) -4.06,-2.384 ccw(c-4.06,4.117)
  pour cut-out: -4.117,97.055 ccw(c-4.117,95.555) -4.117,94.054 cw(c-4.117,90.555) -0.617,90.555 ccw(c0.883,90.555) 0.883,89.054 ccw(c0.883,90.555) 2.384,90.555 ccw(c-4.117,90.555)
  pour cut-out: -280.49,-2.44 ccw(c-280.49,-0.94) -280.49,0.561 cw(c-280.49,4.06) -283.99,4.06 ccw(c-285.49,4.06) -285.49,5.561 ccw(c-285.49,4.06) -286.991,4.06 ccw(c-280.49,4.06)

## Silkscreen, mask and mechanical layers (free items; w line width, h text height)
outline:
  lines w0.203: -195.49,94.615 -195.484,94.608 ; -119.294,94.604 -119.29,94.608
  lines w0.254: -282,0.01 cw(c-282,3.01) -285,3.01 -285,91.615 cw(c-282,91.615) -282,94.615 -195.49,94.615 ; -282,0.015 -3,0.015 ; -198.628,94.615 -119.294,94.615 ; -124.46,94.615 -3,94.615 cw(c-3,91.615) 0,91.615 0,3.01 cw(c-3,3.01) -3,0.01

## Text inside footprints (layer, text, board x,y; h text height)
CON301: Mechanical 15 "connector edge" at -15.25,95.75 h1 r180
LED301: Mechanical 15 "Light direction down" at -0.522,47.359 h1 r180
S262: Mechanical 16 "6.25U" at -188.764,5.615 h1.52 r270; Mechanical 16 "7U" at -208.331,7.365 h1.52 r270